# EAGLE board ext_board (EAGLE 5.01)
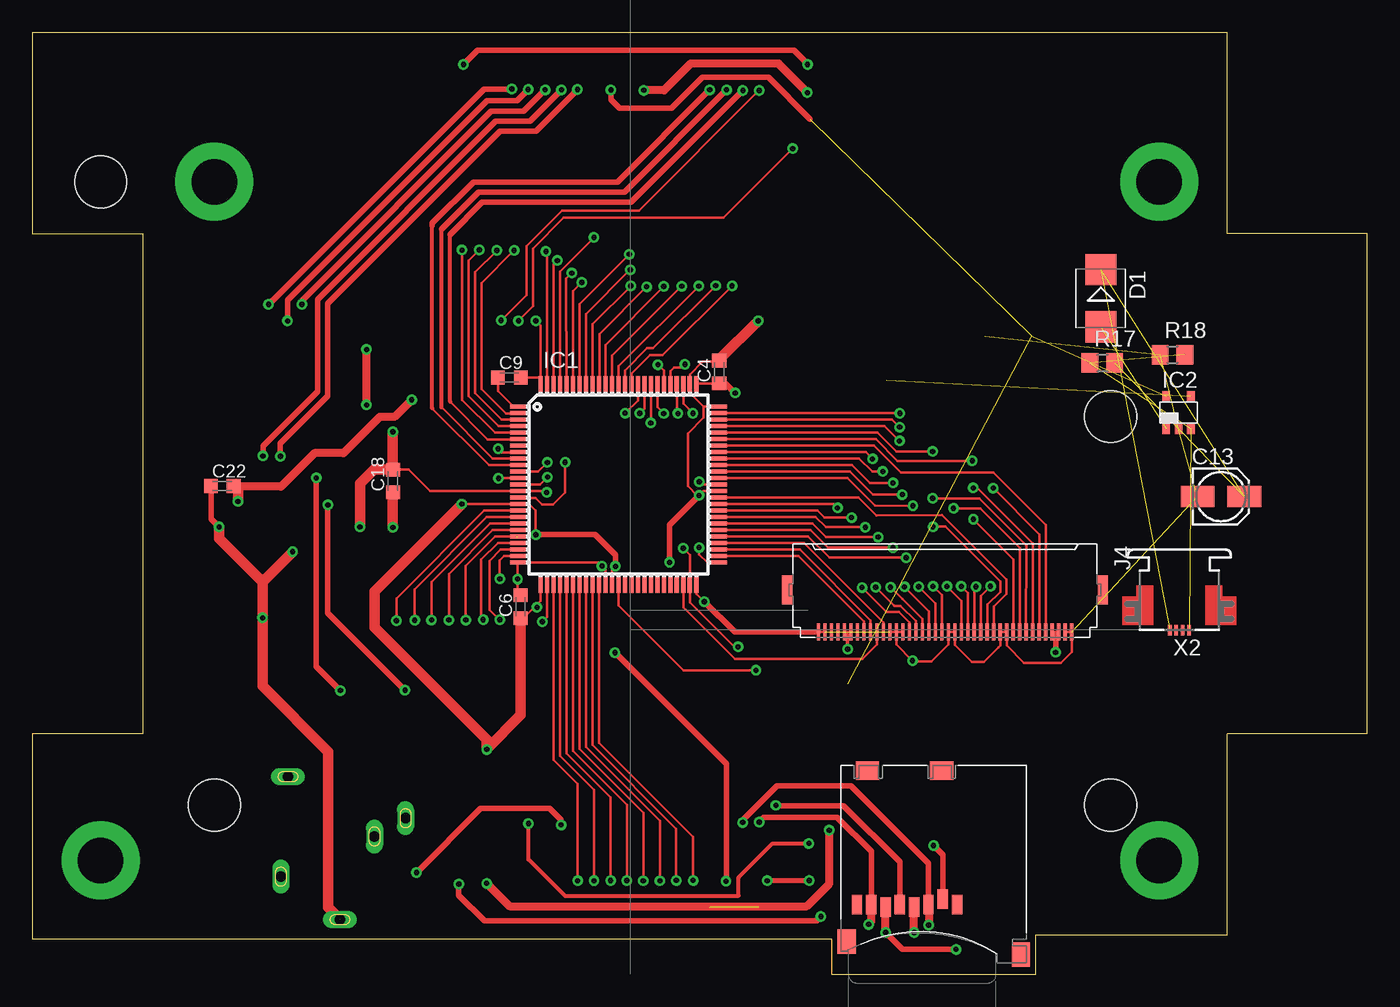
[diagram p0: board, top side]
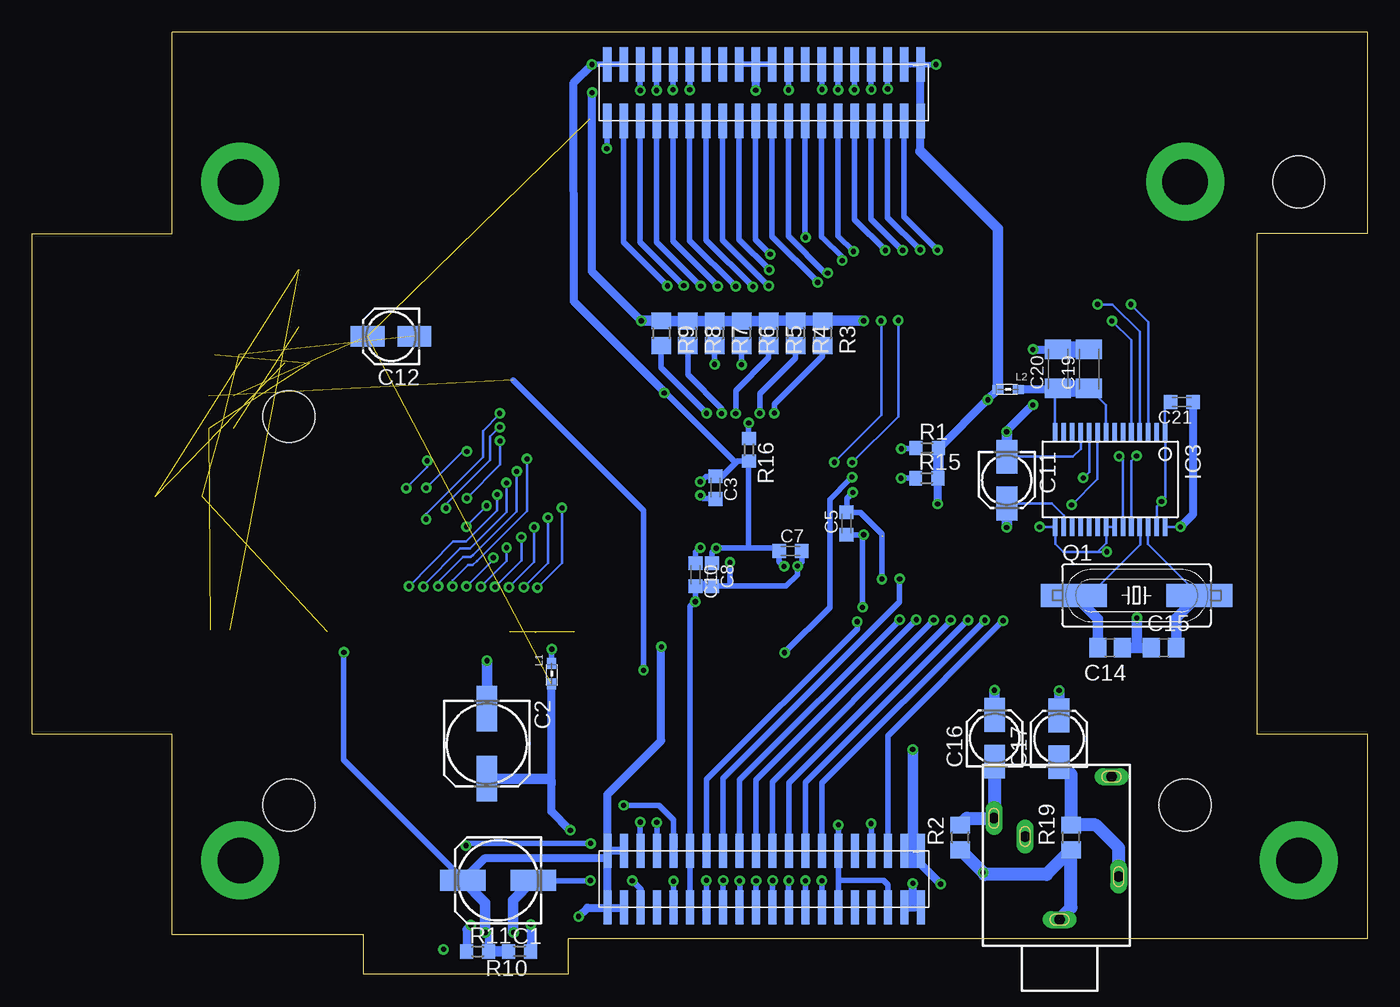
[diagram p1: board, bottom side, seen from below]

Size 102.75 x 72.53 mm. Coordinates in mm from the lower left corner, seen from the top.
Outline: 0,2.73 61.5,2.73 61.5,0 77.27,0 77.27,3.03 92,3.03 92,18.53 102.75,18.53 102.75,57.03 92,57.03 92,72.53 0,72.53 0,57.03 8.5,57.03 8.5,18.53 0,18.53 0,2.73
Copper layers (1*16): Top 0.035mm / dielectric 1.5mm / Bottom 0.035mm
Design rules "default *": minimum track width 0.2mm, minimum drill 0.4mm, track to track 0.2mm, track to pad 0.2mm, pad to pad 0.18mm, via to via 0.2mm, smd to smd 0.1mm, copper to edge 35mil, drill to drill 8mil, minimum pad ring 10mil, minimum via ring 8mil, stop-mask expansion 4mil, vias tented up to drill 0mil, thermal gap 10mil
Holes 4 mm at 83,13.03 14,13.03 5.25,61.03 83,42.95

## Footprints (pad centres in the part's own frame; a part is rotated, then mirrored left to right if it is on the bottom)
153CLV-0605 = smd 3.5 x 1.6: + 2.7,0; - -2.7,0
C0603K = smd 1.05 x 1.08: 1 -0.875,0; 2 0.875,0
153CLV-0405 = smd 2.6 x 1.6: + 1.8,0; - -1.8,0
C0805 = smd 1.3 x 1.5: 1 -0.95,0; 2 0.95,0
C1206K = smd 1.5 x 2: 1 -1.5,0; 2 1.5,0
SMB = smd 2.4 x 2.4: A 2.2,0; C -2.2,0
TQFP100 = smd 1.2 x 0.32: 1 -1.4,12.35; 2 -1.4,11.85; 3 -1.4,11.35; 4 -1.4,10.85; 5 -1.4,10.35; 6 -1.4,9.85; 7 -1.4,9.35; 8 -1.4,8.85; 9 -1.4,8.35; 10 -1.4,7.85; 11 -1.4,7.35; 12 -1.4,6.85; 13 -1.4,6.35; 14 -1.4,5.85; 15 -1.4,5.35; 16 -1.4,4.85; 17 -1.4,4.35; 18 -1.4,3.85; 19 -1.4,3.35; 20 -1.4,2.85; 21 -1.4,2.35; 22 -1.4,1.85; 23 -1.4,1.35; 24 -1.4,0.85; 25 -1.4,0.35; 51 14.1,0.35; 52 14.1,0.85; 53 14.1,1.35; 54 14.1,1.85; 55 14.1,2.35; 56 14.1,2.85; 57 14.1,3.35; 58 14.1,3.85; 59 14.1,4.35; 60 14.1,4.85; 61 14.1,5.35; 62 14.1,5.85; 63 14.1,6.35; 64 14.1,6.85; 65 14.1,7.35; 66 14.1,7.85; 67 14.1,8.35; 68 14.1,8.85; 69 14.1,9.35; 70 14.1,9.85; 71 14.1,10.35; 72 14.1,10.85; 73 14.1,11.35; 74 14.1,11.85; 75 14.1,12.35 | smd 0.32 x 1.2: 26 0.35,-1.4; 27 0.85,-1.4; 28 1.35,-1.4; 29 1.85,-1.4; 30 2.35,-1.4; 31 2.85,-1.4; 32 3.35,-1.4; 33 3.85,-1.4; 34 4.35,-1.4; 35 4.85,-1.4; 36 5.35,-1.4; 37 5.85,-1.4; 38 6.35,-1.4; 39 6.85,-1.4; 40 7.35,-1.4; 41 7.85,-1.4; 42 8.35,-1.4; 43 8.85,-1.4; 44 9.35,-1.4; 45 9.85,-1.4; 46 10.35,-1.4; 47 10.85,-1.4; 48 11.35,-1.4; 49 11.85,-1.4; 50 12.35,-1.4; 76 12.35,14.1; 77 11.85,14.1; 78 11.35,14.1; 79 10.85,14.1; 80 10.35,14.1; 81 9.85,14.1; 82 9.35,14.1; 83 8.85,14.1; 84 8.35,14.1; 85 7.85,14.1; 86 7.35,14.1; 87 6.85,14.1; 88 6.35,14.1; 89 5.85,14.1; 90 5.35,14.1; 91 4.85,14.1; 92 4.35,14.1; 93 3.85,14.1; 94 3.35,14.1; 95 2.85,14.1; 96 2.35,14.1; 97 1.85,14.1; 98 1.35,14.1; 99 0.85,14.1; 100 0.35,14.1
SOT23-5 = smd 0.6 x 0.8: 1 0.32,1.29; 2 1.27,1.29; 3 2.22,1.29; 4 2.22,3.79; 5 0.32,3.79
SSOP28 = smd 0.348 x 1.397: 1 1.614,-0.595; 2 2.264,-0.595; 3 2.914,-0.595; 4 3.564,-0.595; 5 4.214,-0.595; 6 4.864,-0.595; 7 5.514,-0.595; 8 6.164,-0.595; 9 6.814,-0.595; 10 7.464,-0.595; 11 8.114,-0.595; 12 8.764,-0.595; 13 9.414,-0.595; 14 10.064,-0.595; 15 10.064,6.717; 16 9.414,6.717; 17 8.764,6.717; 18 8.114,6.717; 19 7.464,6.717; 20 6.814,6.717; 21 6.164,6.717; 22 5.514,6.717; 23 4.864,6.717; 24 4.214,6.717; 25 3.564,6.717; 26 2.914,6.717; 27 2.264,6.717; 28 1.614,6.717
PLHTD40S-GC = smd 2.65 x 0.65: 1 0,24.13; 2 0,22.86; 3 0,21.59; 4 0,20.32; 5 0,19.05; 6 0,17.78; 7 0,16.51; 8 0,15.24; 9 0,13.97; 10 0,12.7; 11 0,11.43; 12 0,10.16; 13 0,8.89; 14 0,7.62; 15 0,6.35; 16 0,5.08; 17 0,3.81; 18 0,2.54; 19 0,1.27; 20 0,0; 21 4.35,0; 22 4.35,1.27; 23 4.35,2.54; 24 4.35,3.81; 25 4.35,5.08; 26 4.35,6.35; 27 4.35,7.62; 28 4.35,8.89; 29 4.35,10.16; 30 4.35,11.43; 31 4.35,12.7; 32 4.35,13.97; 33 4.35,15.24; 34 4.35,16.51; 35 4.35,17.78; 36 4.35,19.05; 37 4.35,20.32; 38 4.35,21.59; 39 4.35,22.86; 40 4.35,24.13
XF2H-4015-1LW = smd 1.3 x 0.25: 1 3.175,9.75; 2 3.175,9.25; 3 3.175,8.75; 4 3.175,8.25; 5 3.175,7.75; 6 3.175,7.25; 7 3.175,6.75; 8 3.175,6.25; 9 3.175,5.75; 10 3.175,5.25; 11 3.175,4.75; 12 3.175,4.25; 13 3.175,3.75; 14 3.175,3.25; 15 3.175,2.75; 16 3.175,2.25; 17 3.175,1.75; 18 3.175,1.25; 19 3.175,0.75; 20 3.175,0.25; 21 3.175,-0.25; 22 3.175,-0.75; 23 3.175,-1.25; 24 3.175,-1.75; 25 3.175,-2.25; 26 3.175,-2.75; 27 3.175,-3.25; 28 3.175,-3.75; 29 3.175,-4.25; 30 3.175,-4.75; 31 3.175,-5.25; 32 3.175,-5.75; 33 3.175,-6.25; 34 3.175,-6.75; 35 3.175,-7.25; 36 3.175,-7.75; 37 3.175,-8.25; 38 3.175,-8.75; 39 3.175,-9.25; 40 3.175,-9.75 | smd 2.2 x 0.8: M1 -0.075,12.15; M2 -0.075,-12.15
0603 = smd 0.85 x 0.7: 1 -0.9,0; 2 0.7,0
SM49 = smd 5.08 x 1.778: 1 -4.826,0; 2 4.826,0
R0603 = smd 1 x 1.1: 1 -0.85,0; 2 0.85,0
R0805 = smd 1.3 x 1.5: 1 -0.95,0; 2 0.95,0
MICROSD = smd 0.8 x 1.5: 1 -1.94,2.7; 2 -0.84,2.3; 3 0.26,2.7; 4 1.36,2.9; 5 2.46,2.7; 6 3.56,2.9; 7 4.66,2.7; 8 5.76,2.7 | smd 1.4 x 1.9: NC -6.85,6.55; NC3 6.55,5.55 | smd 1.8 x 1.4: NC1 -0.75,-7.6; NC2 4.95,-7.6
1503_09 = drill 0.8 pad 1.2 long: 1 0,-2.1; 2 -4.55,-5.4; 3 5.05,-9.9; 4 -4,-13.1; 5 2.65,-8.5
52746-4 = smd 0.3 x 0.8: 1 -0.75,0.6; 2 -0.25,0.6; 3 0.25,0.6; 4 0.75,0.6

## Placement (x,y rotation side)
C1  47uF/16V  [153CLV-0605]  66.9,7.24 180 bottom
C2  47uF/16V  [153CLV-0605]  67.77,17.77 270 bottom
C3  100n  [C0603K]  50.15,37.48 270 bottom
C4  100n  [C0603K]  52.88,46.38 90 top
C5  100n  [C0603K]  40.09,34.72 90 bottom
C6  100n  [C0603K]  37.59,28.31 90 top
C7  100n  [C0603K]  44.39,32.59 0 bottom
C8  100n  [C0603K]  50.42,30.77 270 bottom
C9  100n  [C0603K]  36.71,45.95 0 top
C10  100n  [C0603K]  51.69,30.78 270 bottom
C11  10uF/25V  [153CLV-0405]  27.74,38.05 270 bottom
C12  4.7uF/50V  [153CLV-0405]  75.14,49.13 180 bottom
C13  1uF/50V  [153CLV-0405]  91.5,36.79 0 top
C14  22pF  [C0805]  19.79,25.15 180 bottom
C15  22pF  [C0805]  15.65,25.15 0 bottom
C16  4.7uF/50V  [153CLV-0405]  28.67,18.18 90 bottom
C17  4.7uF/50V  [153CLV-0405]  23.72,18.14 90 bottom
C18  100n  [C0603K]  27.75,37.98 90 top
C19  4.7uF  [C1206K]  21.4,46.61 90 bottom
C20  4.7uF  [C1206K]  23.8,46.63 90 bottom
C21  100n  [C0603K]  14.26,44.06 180 bottom
C22  100n  [C0603K]  14.62,37.59 0 top
D1  10BQ040PBF  [SMB]  82.26,52.06 270 top
IC1  SSD1906  [TQFP100]  38.76,31.36 0 top
IC2  TPS61040  [SOT23-5]  86.97,40.73 0 top
IC3  TLV320DAC23  [SSOP28]  13.93,41.16 180 bottom
J2  PBHTD40SPP  [PLHTD40S-GC]  58.5,70.07 270 bottom
J3  PBHTD40SPP  [PLHTD40S-GC]  58.48,9.51 270 bottom
J4  XF2H-4015-1LW  [XF2H-4015-1LW]  70.26,29.53 270 top
L1  LCBA-601  [0603]  62.78,23.06 270 bottom
L2  LCBA-601  [0603]  27.74,45.04 180 bottom
Q1  18.432 MHz  [SM49]  17.75,29.19 0 bottom
R1  10k  [R0603]  33.87,40.53 0 bottom
R2  470R  [R0805]  31.32,10.54 90 bottom
R3  4.7k  [R0805]  41.93,49.37 270 bottom
R4  4.7k  [R0805]  44,49.37 270 bottom
R5  4.7k  [R0805]  46.08,49.35 270 bottom
R6  4.7k  [R0805]  48.16,49.37 270 bottom
R7  4.7k  [R0805]  50.24,49.36 270 bottom
R8  4.7k  [R0805]  52.31,49.36 270 bottom
R9  4.7k  [R0805]  54.36,49.37 270 bottom
R10  10k  [R0603]  65.25,1.77 180 bottom
R11  10k  [R0603]  68.49,1.75 0 bottom
R15  10k  [R0603]  33.9,38.21 0 bottom
R16  10k  [R0603]  47.58,40.39 270 bottom
R17  2.2k  [R0805]  82.37,47.07 0 top
R18  1k  [R0805]  87.77,47.72 0 top
R19  470R  [R0805]  22.79,10.55 90 bottom
U$13  SF-MICROSD  [MICROSD]  69.24,8.08 180 top
X1  1503_09  [1503_09]  23.68,2.12 180 bottom
X2  52746-4  [52746-4]  88.3,27.1 180 top

## Library data of the parts
C1-C22 R1-R11 R15-R19 = rcl
D1 = diode
IC1-IC3 J2 J3 = mylib
J4 = con-omron
L1 L2 = wuerth-elektronik
Q1 = crystal
U$13 = microsd
X1 = con-lumberg
X2 = con-molex

## Nets
+3V3: C1.+ C3.1 C4.1 C5.1 C6.1 C7.1 C8.1 C21.2 C22.2 IC1.16 IC1.26 IC1.37 IC1.49 IC1.63 IC1.76 IC3.1 IC3.27 J2.1 J2.2 J2.19 J2.20 J2.40 J3.1 J3.2 J3.19 J3.20 J3.21 J3.22 J4.3 J4.4 L2.2 R1.2 R10.2 R11.2 R15.2 R16.2 U$13.4
+5V: C2.+ C12.+ IC2.5 J2.9 J3.39 J3.40 L1.2
A0/NBS0: IC1.5 J2.39
A1/NBS2: IC1.4 J2.38
A2: IC1.3 J2.37
A3: IC1.2 J2.36
A4: IC1.99 J2.35
A5: IC1.98 J2.34
A6: IC1.97 J2.33
A7: IC1.96 J2.32
A8: IC1.95 J2.31
A9: IC1.94 J2.30
A10: IC1.93 J2.29
A11: IC1.92 J2.28
A12: IC1.91 J2.27
A13: IC1.90 J2.26
A14: IC1.89 J2.25
A15: IC1.88 J2.24
A16/BA0: IC1.87 J2.23
A17/BA1: IC1.86 J2.22
A18: IC1.7
B0: IC1.55 J4.21
B1: IC1.56 J4.22
B2: IC1.57 J4.23
B3: IC1.58 J4.24
B4: IC1.59 J4.25
B5: IC1.60 J4.26
CLK: IC1.54 J4.30
D0: IC1.35 J3.27
D1: IC1.34 J3.28
D2: IC1.33 J3.29
D3: IC1.32 J3.30
D4: IC1.31 J3.31
D5: IC1.30 J3.32
D6: IC1.29 J3.33
D7: IC1.28 J3.34
D8: IC1.27 J3.14
D9: IC1.24 J3.13
D10: IC1.23 J3.12
D11: IC1.22 J3.11
D12: IC1.21 J3.10
D13: IC1.20 J3.9
D14: IC1.19 J3.8
D15: IC1.18 J3.7
DISP: IC1.48 J4.31
G0: IC1.61 J4.13
G1: IC1.64 J4.14
G2: IC1.65 J4.15
G3: IC1.66 J4.16
G4: IC1.67 J4.17
G5: IC1.68 J4.18
GND: C1.- C2.- C3.2 C4.2 C5.2 C6.2 C7.2 C8.2 C9.2 C10.2 C11.- C12.- C13.- C14.1 C15.1 C18.2 C19.2 C20.2 C21.1 C22.1 IC1.14 IC1.25 IC1.36 IC1.50 IC1.62 IC1.75 IC1.77 IC1.100 IC2.2 IC3.11 IC3.15 IC3.21 IC3.22 IC3.28 J2.10 J2.11 J2.12 J3.6 J3.15 J3.23 J3.26 J3.35 J3.38 J4.1 J4.2 J4.11 J4.12 J4.19 J4.20 J4.27 J4.28 J4.29 J4.39 J4.40 R2.1 R3.1 R4.1 R5.1 R6.1 R7.1 R8.1 R9.1 R18.1 R19.1 U$13.6 X1.1
HSYNC: IC1.53 J4.32
MISO: J3.18 R10.1 U$13.7
MOSI: J3.17 R11.1 U$13.3
N$1: IC1.12 R15.1
N$2: IC1.83 R16.1
N$3: J4.35 J4.36 L1.1
N$4: D1.A IC2.1
N$5: IC1.38 IC2.4
N$6: C13.+ D1.C R17.2 X2.4
N$7: IC2.3 R17.1 R18.2 X2.1
N$8: C14.2 IC3.25 Q1.1
N$9: C15.2 IC3.26 Q1.2
N$14: C10.1 IC1.51
N$15: C9.1 IC1.1
N$23: IC1.8 R1.1
N$35: IC1.85 R3.2
N$36: IC1.84 R4.2
N$37: IC1.82 R5.2
N$38: IC1.81 R6.2
N$39: IC1.80 R7.2
N$40: IC1.79 R8.2
N$41: IC1.78 R9.2
N$65: C11.+ C18.1 IC3.16
N$67: C16.+ IC3.9
N$68: C17.+ IC3.10
N$69: C17.- R19.2 X1.2
N$70: C16.- R2.2 X1.3
NBS1/NUB: IC1.11 J2.18
NCS3: IC1.6 J2.17
NOE: IC1.9 J2.16
NPCS1: J3.4 U$13.2
NPCS3: J3.5
NRST: IC1.13 J3.25
NWAIT: IC1.17 J3.3
NWE: IC1.10 J2.15
PB6: J2.8
PB8: J2.13
PB10: J2.14
PB27/PCK0: IC1.15 J2.21
PC10: J3.37
R0: IC1.69 J4.5
R1: IC1.70 J4.6
R2: IC1.71 J4.7
R3: IC1.72 J4.8
R4: IC1.73 J4.9
R5: IC1.74 J4.10
SPCK: J3.16 U$13.5
TD0: IC3.4 J2.5
TF0: IC3.5 J2.4
TK0: IC3.3 J2.3
TWCK: IC3.24 J2.6
TWD: IC3.23 J2.7
VCCA: C19.1 C20.1 IC3.8 IC3.14 L2.1
VSYNC: IC1.52 J4.33

## Tracks (layer width: path | path; a pad name or v marks a point on that pad's centre or on a via)
+3V3  (via drill 0.4)
  Top 0.2: v50.1,32.81 50.61,32.3 IC1.49 50.61,28.65 54.04,25.22 54.06,25.22 v54.32,25.22 | IC1.37 44.61,31.14 44.85,31.38 | C6.1 37.8,27.43 38.8,28.43 39.11,28.74 39.11,29.91 39.13,29.93 IC1.26 | v38.75,33.85 38.75,35.72 38.27,36.2 37.35,36.2 | 37.35,36.2 37.31,36.2 | 37.35,36.2 IC1.16 37.38,36.21 | 51.11,45.43 51.1,45.42 | 51.11,45.43 IC1.76 | C4.1 51.19,45.51 51.11,45.43 | IC1.63 51.56,37.71 v51.34,37.93 | 37.38,36.21 37.4,36.2 | v33.05,36.22 37.37,36.22 37.38,36.21 | J4.3 78.96,26.35 78.95,26.35 J4.4 78.78,26.35 78.78,26.22
  Top 0.406: 38.74,33.86 38.73,33.86 | v38.75,33.85 38.74,33.86 | 38.74,33.86 43.31,33.86 44.88,32.29 v44.88,31.41 44.83,31.36 | 44.83,31.36 | 38.8,28.43 38.84,28.4 v38.84,28.27 v38.84,28.26 | 44.86,31.39 44.85,31.38 | 44.83,31.36 44.86,31.39 | 44.86,31.39 44.86,31.4 | C4.1 53.38,45.51 v54.11,44.77 | 15.82,37.26 C22.2 | v78.78,24.8 78.78,26.22 | v33.19,70.07 34.27,71.15 58.63,71.15 59.68,70.11 v59.68,70.07 | v60.7,4.46 60.38,4.14 34.79,4.14 32.82,6.1 v32.82,6.95
  Top 0.6: 15.82,37.26 15.82,37.56 19.13,37.56 21.71,40.14 23.95,40.14 26.73,42.92 27.88,42.92 v29.2,44.24
  Top 0.61: U$13.4 67.87,5.18 67.87,3.24 v67.89,3.22
  Top 0.813: v15.82,36.42 15.83,36.43 15.82,36.44 15.82,37.26 | v34.98,17.32 34.98,18.08 26.34,26.71 26.34,29.49 33.05,36.2 v33.05,36.22 | C6.1 37.59,19.97 34.99,17.36
  Bottom 0.2: IC3.27 16.2,36.04 v15.82,36.42 15.84,36.42 15.55,36.71 IC3.1 15.56,41.77 15.56,43.64 C21.2
  Bottom 0.406: 35.62,9.56 35.63,9.57 | 35.62,9.56 J3.2 | J3.1 34.97,9.51 35.57,9.51 35.62,9.56 | J3.19 57.28,9.51 57.36,9.43 57.44,9.51 J3.20 58.45,9.54 | 58.5,5.13 58.5,5.15 J3.21 58.48,5.14 | 57.24,5.13 J3.22 | 58.48,5.14 58.45,5.1 | 58.48,5.14 58.45,5.24 58.5,5.28 58.5,9.39 58.45,9.44 58.45,9.54 | 58.45,9.54 58.45,9.56 | J2.1 34.39,70.05 35.66,70.05 | 34.37,65.74 J2.40 34.37,65.66 34.41,65.62 34.37,65.57 | 35.66,70.05 35.67,70.05 | 35.66,70.05 J2.2 | J2.20 58.54,70.07 | J2.20 | J2.20 J2.19 57.22,70.08 | 69.65,7.24 C1.+ 69.55,7.29 78.78,16.51 v78.78,24.8 | C8.1 50.42,32.49 v50.1,32.81 50.11,32.82 | v44.88,31.41 45.26,31.8 C7.1 45.49,32.82 50.11,32.82 | C5.1 v38.75,33.85 38.84,33.76 v38.84,28.26 | 50.11,32.82 50.12,32.82 | 54.05,44.79 v54.11,44.77 | 54.04,44.81 53.88,44.68 48.62,39.43 48.49,39.55 | 48.49,39.55 47.68,39.55 47.66,39.57 47.63,39.54 R16.2 47.62,39.54 | v51.34,37.93 50.91,38.35 C3.1 49.67,38.35 48.49,39.53 48.49,39.55 | 47.62,39.54 47.62,39.55 | 50.11,32.82 47.62,32.82 47.62,39.54 | 35.66,70.05 33.2,70.05 v33.19,70.07 | 57.22,70.08 57.21,70.08 | v59.68,70.07 59.66,70.08 57.22,70.08
  Bottom 0.6: R1.2 32.94,40.54 29.23,44.25 | 29.23,44.25 L2.2 | 29.23,44.25 29.22,44.24 v29.2,44.24 | R15.2 v33.05,36.22 | 34.37,63.37 34.37,65.57
  Bottom 0.61: 34.37,65.74 J2.1 | v67.89,3.22 v67.88,3.22 67.87,3.23 67.64,2.99 R11.2 | 58.48,5.14 58.48,8.93 67.96,8.93 69.65,7.24 | 54.05,44.79 61.08,51.83 61.12,68.62 59.72,70.02 59.7,70.02 59.7,70.04 v59.68,70.07 | J3.19 J3.20 58.48,13.85 54.34,17.99 54.34,25.06 54.42,25.14 54.33,25.22 v54.32,25.22 | 57.24,5.13 60.03,5.13 v60.7,4.46 | v32.82,6.95 34.37,8.49 35.25,8.49 34.97,8.77 | 34.97,9.51
  Bottom 0.813: C1.+ 67.89,5.53 v67.89,3.22 | R11.2 67.62,1.75 67.59,1.72 67.55,1.77 R10.2 | v34.98,17.32 34.97,17.15 34.97,9.51 | R15.2 33.02,38.24 R1.2 | L2.2 28.44,57.44 34.37,63.37 | 34.97,8.77 34.97,9.51
+5V  (via drill 0.4)  (3 unrouted)
  Top 0.406: v44.53,68.1 44.53,67.35 45.19,66.69 49.2,66.69 51.57,69.06 56.67,69.06 59.88,65.85
  Top 0.61: v34.97,7.01 36.73,5.25 59.61,5.25 61.35,6.98 v61.35,11.1
  Bottom 0.406: J3.39 J3.40 | J2.9 v44.53,68.1
  Bottom 0.61: J3.39 34.72,5.16 34.72,5.67 35.04,5.67 35.04,5.83 34.97,5.83 v34.97,7.01 | 62.78,14.89 62.78,14.64 62.78,14.65 62.79,14.65 62.79,12.54 v61.35,11.1 | 62.78,14.89 L1.2 | 62.78,14.89 63.13,15.05
  Bottom 0.813: C2.+ 67.59,15.05 63.13,15.05
A0/NBS0  (via drill 0.4)
  Top 0.2: v33.07,55.78 33.07,54.86 33.07,44.24 35.6,41.71 IC1.5 | IC1.5 | IC1.5 | IC1.5 37.39,41.68
  Bottom 0.406: J2.39 35.64,58.36 v33.07,55.78
A1/NBS2  (via drill 0.4)
  Top 0.2: v34.41,55.79 33.57,54.95 33.57,44.53 35.89,42.21 IC1.4 | IC1.4 37.45,42.21 | IC1.4
  Bottom 0.406: J2.38 36.91,58.29 v34.41,55.79
A2  (via drill 0.4)
  Top 0.2: v35.76,55.75 34.07,54.06 34.08,44.77 36.13,42.72 37.1,42.72 | 37.1,42.72 37.23,42.72 | 37.1,42.72 37.1,42.73 37.13,42.71 IC1.3
  Bottom 0.406: J2.37 38.18,58.17 v35.76,55.75
A3  (via drill 0.4)
  Top 0.2: v37.08,55.75 34.57,53.24 34.58,45.06 36.46,43.18 37.39,43.18 | 37.39,43.18 37.56,43.18 | IC1.2 37.39,43.18
  Bottom 0.406: J2.36 39.45,58.11 v37.08,55.75
A4  (via drill 0.4)
  Top 0.2: IC1.99 39.62,55.59 v39.54,55.67
  Bottom 0.406: J2.35 40.72,56.86 v39.54,55.67
A5  (via drill 0.4)
  Top 0.2: IC1.98 40.11,54.67 v40.41,54.97
  Bottom 0.406: J2.34 42,65.77 | J2.34 | v40.41,54.97 40.41,55.22 41.97,56.77 42,56.82 J2.34
A6  (via drill 0.4)
  Top 0.2: IC1.97 40.61,54.12 v43.23,56.74
  Bottom 0.406: J2.33 43.26,56.76 v43.23,56.74
A7  (via drill 0.4)
  Top 0.2: IC1.96 41.1,53.58 v41.53,54.01
  Bottom 0.406: v41.53,54.01 41.72,54.01 44.55,56.83 44.54,65.74 | 44.54,65.74 | 44.54,65.74 J2.32
A8  (via drill 0.4)
  Top 0.2: IC1.95 41.61,52.61 v42.29,53.29
  Bottom 0.406: J2.31 45.8,56.8 v42.29,53.29
A9  (via drill 0.4)
  Top 0.2: IC1.94 42.12,51.62 v45.95,55.45
  Bottom 0.406: J2.30 47.07,56.57 v45.95,55.45
A10  (via drill 0.4)
  Top 0.2: IC1.93 42.61,50.84 v46.02,54.25
  Bottom 0.406: J2.29 48.36,65.7 48.34,56.58 v46.02,54.25
A11  (via drill 0.4)
  Top 0.2: 43.14,45.43 43.14,45.36 | IC1.92 43.14,45.43 | v46.07,53.01 43.14,50.08 43.14,45.43
  Bottom 0.406: J2.28 49.61,56.55 v46.07,53.01
A12  (via drill 0.4)
  Top 0.2: 43.64,45.43 43.64,45.36 | IC1.91 43.64,45.43 | v47.28,52.95 43.64,49.31 43.64,45.43
  Bottom 0.406: J2.27 50.88,56.55 v47.28,52.95
A13  (via drill 0.4)
  Top 0.2: IC1.90 | IC1.90 | v48.6,52.97 44.11,48.47 IC1.90
  Bottom 0.406: J2.26 52.15,56.52 v48.6,52.97
A14  (via drill 0.4)
  Top 0.2: IC1.89 44.63,45.45 44.63,47.64 v49.99,52.99
  Bottom 0.406: J2.25 53.44,56.44 v49.99,52.99
A15  (via drill 0.4)
  Top 0.2: IC1.88 45.12,46.82 v51.3,53
  Bottom 0.406: J2.24 54.7,56.4 v51.3,53
A16/BA0  (via drill 0.4)
  Top 0.2: v52.61,53.03 47.78,48.21 47.3,48.21 45.6,46.51 45.6,45.32 45.61,45.33 IC1.87
  Bottom 0.406: J2.23 55.96,56.38 v52.61,53.03
A17/BA1  (via drill 0.4)
  Top 0.2: v53.87,53.01 48.51,47.68 47.56,47.68 46.13,46.25 46.13,45.48 IC1.86
  Bottom 0.406: J2.22 57.23,56.4 v53.87,53.01
B0  (via drill 0.4)
  Top 0.2: IC1.55 59.72,33.71 61.34,32.08 v67.26,32.08 | v67.26,32.08 | J4.21 70.03,26.37 | J4.21 | v69.33,29.88 70,29.2 J4.21
  Bottom 0.2: v67.26,32.08 67.3,31.91 v69.33,29.88
B1  (via drill 0.4)
  Top 0.2: IC1.56 59.88,34.21 61.23,32.86 v66.25,32.86 | 69.53,26.3 69.53,26.33 J4.22 69.52,26.37 69.52,28.57 v68.22,29.86
  Bottom 0.2: v66.25,32.86 66.24,31.84 v68.22,29.86
B2  (via drill 0.4)
  Top 0.2: IC1.57 60.06,34.71 61.09,33.68 v65.11,33.67 | 69.03,26.3 69.03,26.34 J4.23 69.02,26.34 | 69.02,26.34 | v67.14,29.84 69.02,27.95 69.02,26.34
  Bottom 0.2: v65.11,33.67 65.1,31.88 v67.14,29.84
B3  (via drill 0.4)
  Top 0.2: IC1.58 60.28,35.21 61.07,34.43 v64.12,34.43 | v66.06,29.82 66.98,28.89 68.51,27.36 J4.24 | 68.53,26.24 68.53,26.34 J4.24 | J4.24 | J4.24
  Bottom 0.2: v64.12,34.43 64.13,31.74 v66.06,29.82
B4  (via drill 0.4)
  Top 0.2: IC1.59 60.43,35.71 60.97,35.17 v63.06,35.17 | v64.92,29.82 66.34,28.41 66.37,28.38 66.83,28.38 68.01,27.2 J4.25 68.04,26.39
  Bottom 0.2: v63.06,35.17 63.05,31.68 v64.92,29.82
B5  (via drill 0.4)
  Top 0.2: IC1.60 61.69,36.21 v61.98,35.91 | v63.87,29.79 65.75,27.9 66.7,27.9 67.52,27.08 J4.26 | J4.26 | J4.26
  Bottom 0.2: v61.98,35.91 61.97,31.68 v63.87,29.79
CLK
  Top 0.2: IC1.54 59.4,33.2 65.51,27.1 65.52,26.41 65.51,26.4 J4.30
D0  (via drill 0.4)
  Top 0.2: IC1.35 43.61,17.84 50.86,10.59 v50.86,7.24
  Bottom 0.406: J3.27 50.86,5.11 | J3.27 | J3.27 v50.86,7.24
D1  (via drill 0.4)
  Top 0.2: IC1.34 43.11,17.67 49.56,11.21 v49.56,7.24
  Bottom 0.406: J3.28 | v49.56,7.24 49.59,7.21 J3.28
D2  (via drill 0.4)
  Top 0.2: IC1.33 42.61,17.51 48.3,11.82 v48.3,7.2
  Bottom 0.406: J3.29 48.3,5.15 48.29,5.15 48.29,7.19 v48.3,7.2
D3  (via drill 0.4)
  Top 0.2: IC1.32 42.11,17.36 47.03,12.44 v47.03,7.2
  Bottom 0.406: 47.03,5.15 47.03,5.11 | J3.30 47.03,5.15 | 47.03,5.15 v47.03,7.2
D4  (via drill 0.4)
  Top 0.2: IC1.31 41.61,17.22 45.76,13.06 v45.76,7.21
  Bottom 0.406: J3.31 45.76,5.18 v45.76,7.21
D5  (via drill 0.4)
  Top 0.2: IC1.30 41.11,17.03 44.5,13.64 v44.51,7.21
  Bottom 0.406: J3.32 44.53,5.18 44.53,7.2 v44.51,7.21
D6  (via drill 0.4)
  Top 0.2: IC1.29 40.61,16.83 43.25,14.2 v43.24,7.2
  Bottom 0.406: J3.33 v43.24,7.2
D7  (via drill 0.4)
  Top 0.2: IC1.28 40.11,16.53 41.96,14.68 41.95,7.14 v41.98,7.2
  Bottom 0.406: J3.34 41.97,7.3 v41.98,7.2
D8  (via drill 0.4)
  Top 0.2: IC1.27 39.61,27.51 v39.25,27.15
  Bottom 0.406: v39.25,27.15 39.25,26.61 50.85,15.01 50.85,9.37 | 50.85,9.37 50.86,9.37 J3.14 | 50.85,9.37 50.83,9.34
D9  (via drill 0.4)
  Top 0.2: IC1.24 36.31,32.21 35.97,31.87 35.97,30.48 v35.99,30.46
  Bottom 0.406: v35.99,30.46 35.99,28.67 49.57,15.09 49.57,9.72 49.66,9.63 49.59,9.55 J3.13
D10  (via drill 0.4)
  Top 0.2: v35.98,27.31 35.2,28.08 35.2,31.84 36.06,32.7 37.33,32.7 37.34,32.71 IC1.23
  Bottom 0.406: J3.12 48.32,14.96 v35.98,27.31
D11  (via drill 0.4)
  Top 0.2: IC1.22 35.83,33.21 34.56,31.94 34.56,27.45 v34.7,27.31
  Bottom 0.406: J3.11 47.03,9.53 47.03,14.98 v34.7,27.31
D12  (via drill 0.4)  (1 unrouted)
  Top 0.2: v33.36,27.28 33.36,31.46 35.62,33.72 37.28,33.72
  Bottom 0.406: J3.10 45.78,14.82 v33.36,27.28
D13  (via drill 0.4)
  Top 0.2: v32.06,27.29 32.06,30.85 35.41,34.2 37.49,34.2 37.48,34.21 IC1.20
  Bottom 0.406: J3.9 44.51,14.75 32.13,27.13 v32.06,27.29
D14  (via drill 0.4)
  Top 0.2: v30.73,27.28 30.73,30.21 35.23,34.71 37.22,34.71 37.24,34.69 37.26,34.71 IC1.19
  Bottom 0.406: J3.8 43.24,14.77 v30.73,27.28
D15  (via drill 0.4)
  Top 0.2: IC1.18 34.97,35.21 29.41,29.65 v29.42,27.26
  Bottom 0.406: J3.7 41.98,9.51 41.95,14.74 v29.42,27.26
DISP
  Top 0.2: IC1.48 50.11,28.27 54.08,24.3 63.89,24.28 65.02,25.4 65.02,26.26 65,26.28 65.01,26.3 J4.31
G0
  Top 0.2: IC1.61 63.6,36.71 64.98,35.33 70.03,35.35 74.98,30.4 74.98,29.27 74.97,29.27 74.01,28.32 J4.13
G1  (via drill 0.4)
  Top 0.2: IC1.64 62.76,38.21 64.87,36.1 v67.79,36.08 | 73.49,26.35 73.48,26.35 | J4.14 73.49,26.35 | 73.49,26.35 73.52,26.39 73.52,28.47 74.52,29.45 74.53,30 74.52,30.24 70.27,34.49 v69.33,34.47
  Bottom 0.2: v69.33,34.47 v69.34,34.46 69.34,34.46 69.34,34.52 v67.79,36.08
G2  (via drill 0.4)
  Top 0.2: IC1.65 62.92,38.71 64.69,36.94 v66.97,36.94 | J4.15 73.04,26.35 73.04,29.15 v73.76,29.89
  Bottom 0.2: v66.97,36.94 66.97,35.7 69.35,33.33 70.35,33.33 v73.76,29.89
G3  (via drill 0.4)
  Top 0.2: IC1.66 63.1,39.21 64.47,37.84 v66.26,37.84 | J4.16 | J4.16 | v72.64,29.86 72.51,29.74 J4.16
  Bottom 0.2: v66.26,37.84 66.24,35.61 69.05,32.81 69.81,32.81 72.64,29.96 | 72.64,29.96 72.64,29.98 | 72.64,29.96 v72.64,29.86
G4  (via drill 0.4)
  Top 0.2: IC1.67 63.65,39.71 64.65,38.7 65.48,38.7 v65.48,38.72 | J4.17 72.03,26.4 72.02,29.38 v71.52,29.88
  Bottom 0.2: v65.48,38.72 65.48,35.65 68.83,32.3 69.01,32.12 69.59,32.12 71.52,30.2 v71.52,29.88
G5  (via drill 0.4)
  Top 0.2: IC1.68 64.16,40.21 v64.68,39.69 | J4.18 71.52,26.37 71.53,26.39 71.53,28.76 v70.41,29.88
  Bottom 0.2: v64.68,39.69 64.69,35.67 68.53,31.84 68.85,31.52 69.21,31.52 70.41,30.32 v70.41,29.88
GND  (via drill 0.4)  (7 unrouted)
  Top 0.2: v38.75,50.32 39.11,49.95 IC1.100 39.13,45.46 | 51.12,29.98 51.11,29.98 IC1.50 | v51.72,28.7 51.11,29.31 51.11,29.98 51.12,29.98 | 51.12,29.98 51.13,29.99 | 44.11,29.88 IC1.36 44.11,31.17 43.89,31.39 | v43.85,31.44 v43.84,31.44 | 39.13,45.46 39.13,45.38 | C9.2 39.13,45.95 39.13,45.46 | C6.2 37.35,29.6 v37.35,30.43 37.35,31.71 IC1.25 | v39.59,37.11 39.49,37.21 38.92,37.21 37.41,37.21 37.39,37.19 IC1.14 37.42,37.21 | IC1.25 37.27,31.71 | 43.89,31.39 43.57,31.71 IC1.25 | v43.84,31.44 43.84,31.44 | 43.89,31.39 v43.84,31.44 | C4.2 52.89,47.24 52.89,47.19 51.6,47.19 50.61,46.2 IC1.77 50.61,45.4 50.62,45.38 50.61,45.37 50.61,44.77 51.67,43.71 | 51.67,43.71 IC1.75 | 51.66,37.21 IC1.62 | 51.16,36.88 50.46,37.58 50.46,41.66 51.67,42.87 51.67,43.67 51.65,43.69 51.67,43.71 | v51.33,36.88 | 51.66,37.21 | v51.33,36.88 51.66,37.21 | C18.2 28.96,38.86 30.61,37.21 37.42,37.21 | 37.42,37.21 37.44,37.19 | J4.39 61,26.35 60.99,26.36 60.99,26.35 J4.40 | 66.51,26.36 66.52,26.37 | 66.51,26.36 J4.28 66.96,26.35 66.98,26.37 66.99,26.35 J4.27 66.53,26.35 66.53,25.39 v67.76,24.15 67.82,24.11 67.83,24.1 67.84,24.11 69.22,24.11 70.51,25.4 J4.20 70.98,26.35 70.99,26.35 J4.19 71.01,25.38 72.34,24.05 73.24,24.05 74.38,25.19 74.5,25.32 74.51,26.29 J4.12 74.97,26.35 75,26.38 75.01,26.37 J4.11 75.01,25.32 76.32,24 79.2,24 80.02,24.82 80.02,26.32 80.04,26.35 80.03,26.35 J4.1 79.98,26.35 79.97,26.36 79.97,26.35 J4.2 | J4.29 J4.28 66.51,26.36
  Top 0.406: v56.56,7.2 56.48,7.24 v59.8,7.22 | v65.69,3.22 66.99,1.92 v71.1,1.92 | C4.2 52.88,47.32 | v49.05,31.72 49.05,34.6 v51.33,36.88 51.16,36.88 | C22.1 13.74,35.08 v14.37,34.46 | v40.7,11.51 40.7,11.89 39.8,12.79 34.52,12.79 v29.56,7.84 | v51.72,28.7 51.72,28.71 54.08,26.35 J4.40
  Top 0.6: v25.72,43.84 v25.72,48.12
  Top 0.61: 65.69,5.17 U$13.6 v65.69,3.22 | v47.06,68.08 48.63,68.08 50.67,70.12 57.45,70.12 v59.66,67.9
  Top 0.813: 52.88,47.32 v55.88,50.32 | v27.74,41.77 C18.2 27.7,38.86 27.68,38.89 26.31,38.89 25.21,37.78 v25.21,34.46 | v20.03,32.54 17.72,30.22 17.62,30.32 | 17.62,30.32 14.37,33.57 v14.37,34.46 | 17.72,30.42 | 17.72,30.42 17.62,30.32 | 17.72,30.42 v17.72,27.45 17.7,27.43 17.7,22.21 22.77,17.14 22.77,5.14 23.68,4.24
  Bottom 0.2: IC3.28 15.52,34.45 15.51,34.46 v14.37,34.46 | IC3.11 22.05,40.44 22.63,39.85 27.68,39.85 27.7,39.83 27.72,39.85 C11.- | IC3.21 IC3.22 | IC3.21 20.12,34.43 | 20.75,32.54 23.39,32.54 24,33.14 IC3.15 24.98,34.45 v25.21,34.46 | 20.75,32.54 20.09,33.2 20.09,34.3 20.1,34.31 IC3.21 | 20.75,32.54 v20.03,32.54
  Bottom 0.406: 52.13,9.55 J3.15 | J3.26 52.13,9.55 | 52.13,9.55 52.11,9.57 52.11,28.32 51.73,28.7 v51.72,28.7 51.69,29.29 C10.2 | J3.35 40.7,7.26 | 40.7,7.26 J3.6 v40.7,11.51 | J2.11 J2.10 | J2.11 J2.12 | J2.12 J2.11 | J2.12 | J3.23 55.91,6.54 v56.56,7.2 | C1.- 64.18,7.22 v59.8,7.22 | v71.1,1.92 71.13,1.92 | C7.2 43.51,31.77 v43.85,31.44 43.89,31.44 43.87,31.41 43.87,30.75 44.72,29.9 49.05,29.9 | v37.35,30.43 37.35,33.91 39.02,35.58 40.1,35.58 C5.2 40.03,35.49 40.03,36.66 v39.59,37.11 | 49.05,29.9 C8.2 | R9.1 54.49,50.32 54.53,50.28 54.58,50.32 | C3.2 50.2,36.65 51.1,36.65 v51.33,36.88 | v49.05,31.72 49.05,29.9 | J3.38 36.89,6.9 37.24,7.26 40.7,7.26 | 29.51,7.78 29.53,7.76 29.56,7.8 v29.56,7.84 | J2.11 J2.12 | v59.66,67.9 59.8,67.78 59.82,67.75
  Bottom 0.6: C21.1 13.38,35.44 v14.37,34.46 | 21.41,48.1 25.7,48.1 v25.72,48.12 | v27.74,41.77 27.83,41.77 25.76,43.84 v25.72,43.84
  Bottom 0.61: v47.06,68.08 J2.11 | v59.66,67.9 59.68,67.88 59.68,54.12 v55.88,50.32
  Bottom 0.813: C1.- 64.24,7.24 65.75,5.72 65.75,3.28 v65.69,3.22 | 44.08,50.32 R4.1 | 44.08,50.32 R3.1 41.97,50.32 v38.75,50.32 | 44.08,50.32 | 46.08,50.36 46.09,50.37 | 46.08,50.36 R5.1 48.01,50.3 48.07,50.37 48.12,50.32 R6.1 50.16,50.32 50.19,50.35 50.22,50.31 R7.1 52.34,50.31 | 44.08,50.32 46.04,50.32 46.08,50.36 | 52.34,50.31 52.33,50.31 R8.1 54.38,50.31 54.39,50.32 | 52.34,50.31 52.39,50.37 | 54.39,50.32 54.42,50.35 | R9.1 54.39,50.32 | C8.2 50.44,29.92 50.46,29.9 C10.2 | v55.88,50.32 54.58,50.32 | C14.1 18.75,25.15 18.75,25.16 18.75,25.15 17.72,25.15 | 17.72,25.15 C15.1 | 27.72,39.84 27.72,39.72 | 27.72,39.84 C11.- | v27.74,41.77 27.72,41.73 27.72,39.84 | v17.72,27.45 17.72,25.15 | C2.- 67.93,20.53 67.77,20.66 v67.76,24.15
  Bottom 1.016: 23.68,4.24 X1.1 23.69,4.23 22.79,5.13 R19.1 24.68,7.7 29.43,7.7 29.51,7.78 31.24,9.51 31.37,9.51 31.37,9.54 R2.1
  Bottom 1.27: 24.09,48.1 24.24,48.1 | 24.09,48.1 C20.2 | C19.2 21.41,48.1 24.09,48.1
HSYNC
  Top 0.2: IC1.53 59.07,32.71 64.51,27.27 64.51,26.28 64.51,26.29 J4.32
MISO  (via drill 0.4)
  Top 0.406: U$13.7 64.58,9.46 61.95,12.1 56.28,12.1 v55.96,11.73
  Top 0.61: U$13.7 64.58,4.05 v64.38,3.85
  Bottom 0.406: 55.96,9.51 55.95,9.51 J3.18 | v55.96,11.73 55.96,9.51 | 55.96,9.51 55.98,9.48
  Bottom 0.61: R10.1 64.45,1.71 | R10.1 | v64.38,3.85 64.38,1.78 R10.1
MOSI  (via drill 0.4)
  Top 0.406: v54.69,11.7 54.69,11.89 57.31,14.51 63.01,14.51 68.98,8.56 68.98,5.09 | 68.98,5.09 U$13.3 | 68.98,5.09 68.95,5.07
  Top 0.61: U$13.3 68.94,5.38 68.93,5.38 69,5.31 v69,3.79
  Bottom 0.406: J3.17 54.67,11.68 v54.69,11.7
  Bottom 0.61: R11.1 69.34,3.46 v69,3.79
N$1  (via drill 0.4)
  Top 0.2: 37.37,38.21 37.39,38.23 | 37.37,38.21 IC1.12 | v35.88,38.2 IC1.12 37.37,38.21
  Bottom 0.406: R15.1 35.73,38.21 v35.88,38.2
N$2  (via drill 0.4)
  Top 0.2: IC1.83 47.61,42.52 v47.61,42.46
  Bottom 0.406: R16.1 47.62,41.26 47.61,41.19 47.61,41.28 v47.61,42.46
N$3  (via drill 0.4)
  Top 0.2: J4.36 62.53,26.34 62.55,26.35 J4.35 62.77,26.35 62.77,26.19
  Top 0.254: 62.77,26.19 62.75,26.19 v62.77,25.04
  Bottom 0.406: 62.78,24.99 62.78,24.92 | 62.78,24.92 L1.1 | v62.77,25.04 62.78,24.92
N$4  (1 unrouted)
N$5  (via drill 0.4)  (1 unrouted)
  Top 0.2: IC1.38 45.11,28.42 50.12,23.41 v55.7,23.41
  Bottom 0.406: v55.7,23.41 55.7,35.7 65.75,45.75
N$6  (3 unrouted)
N$7  (3 unrouted)
N$8
  Bottom 0.2: 21.97,28.62 | 21.97,28.62 17.47,33.11 17.47,34.42 IC3.25
  Bottom 0.813: Q1.1 22.54,29.19 21.97,28.62 20.74,27.38 C14.2
N$9
  Bottom 0.2: Q1.2 16.86,33.12 16.86,34.3 16.85,34.31 IC3.26 | IC3.26 16.85,34.48 | IC3.26
  Bottom 0.813: C15.2 14.7,25.14 14.7,25.13 14.7,27.45 12.92,29.22 | 12.92,29.22 12.85,29.3 | 12.92,29.22 Q1.2
N$10  (via drill 3.5 pad 6)
  other vias: 14,61.03
N$11  (via drill 3.5 pad 6)
  other vias: 86.75,61.03
N$12  (via drill 3.5 pad 6)
  other vias: 5.25,8.78
N$13  (via drill 3.5 pad 6)
  other vias: 86.75,8.78
N$14  (via drill 0.4)
  Top 0.2: v51.33,32.87 51.33,32.34 51.95,31.71 52.78,31.71 52.79,31.7 52.8,31.71 IC1.51
  Bottom 0.406: C10.1 51.69,32.51 v51.33,32.87
N$15
  Top 0.2: IC1.1 37.06,43.71 35.84,44.93 C9.1
N$23  (via drill 0.4)
  Top 0.2: 37.37,40.2 37.45,40.2 | 37.37,40.2 IC1.8 | v35.86,40.47 36.13,40.2 37.37,40.2
  Bottom 0.406: R1.1 35.11,40.47 v35.86,40.47
N$35  (via drill 0.4)
  Top 0.2: IC1.85 46.61,44.19 v45.63,43.21
  Bottom 0.406: v45.63,43.21 45.63,43.92 41.93,47.62 41.93,48.38 41.96,48.41 41.95,48.42 R3.2
N$36  (via drill 0.4)
  Top 0.2: IC1.84 47.11,43.56 v46.75,43.2
  Bottom 0.406: v46.75,43.2 46.75,44.7 43.99,47.46 43.99,48.34 43.97,48.36 44.01,48.39 R4.2
N$37  (via drill 0.4)
  Top 0.2: IC1.82 48.11,43.67 v48.6,43.18
  Bottom 0.406: v48.6,43.18 48.6,44.97 46.08,47.49 R5.2
N$38  (via drill 0.4)
  Top 0.2: IC1.81 48.61,45.51 48.61,46.5 v48.16,46.95
  Bottom 0.406: R6.2 v48.16,46.95
N$39  (via drill 0.4)
  Top 0.2: IC1.80 49.11,46.45 49.39,46.73 49.99,46.73 v50.23,46.97
  Bottom 0.406: R7.2 50.24,48.35 50.23,48.34 v50.23,46.97
N$40  (via drill 0.4)
  Top 0.2: IC1.79 49.61,43.28 v49.7,43.19
  Bottom 0.406: v49.7,43.19 49.7,43.58 52.3,46.18 52.3,47.88 52.34,47.93 52.31,47.96 R8.2
N$41  (via drill 0.4)
  Top 0.2: IC1.78 50.11,43.94 v50.85,43.2
  Bottom 0.406: 54.37,48.01 | 54.37,48.01 R9.2 | v50.85,43.2 54.37,46.73 54.37,48.01
N$65  (via drill 0.4)
  Top 0.813: C18.1 v27.74,34.41
  Bottom 0.2: IC3.16 23.35,35.35 24.26,36.26 27.81,36.26 27.8,36.25 C11.+
  Bottom 0.813: C11.+ v27.74,34.41
N$67  (via drill 0.4)
  Top 0.406: v22.74,36.15 22.74,27.82 v28.68,21.88
  Bottom 0.2: IC3.9 20.75,38.15 v22.74,36.15
  Bottom 0.813: 28.68,19.96 C16.+ | 28.68,19.96 v28.68,21.88 | 28.68,19.96 28.69,19.95
N$68  (via drill 0.4)
  Top 0.406: v21.85,38.23 21.85,23.71 v23.7,21.86
  Bottom 0.2: IC3.10 21.4,38.68 v21.85,38.23
  Bottom 0.813: C17.+ 23.72,19.58 23.7,19.57 v23.7,21.86
N$69
  Bottom 1.016: C17.- 22.77,15.4 22.77,11.51 R19.2 20.88,11.5 19.11,9.73 19.11,7.61 19.03,7.53 19.04,7.52 X1.2
N$70
  Bottom 1.016: R2.2 30.79,12.03 X1.3 28.64,12.11 28.64,16.35 C16.-
NBS1/NUB  (via drill 0.4)
  Top 0.2: v55.95,68.07 46.7,58.81 40.77,58.81 38.03,56.08 38.03,52.3 v36.09,50.36 | IC1.11 38.94,38.71 v39.64,39.41
  Bottom 0.2: v36.09,50.36 36.09,42.97 v39.64,39.41
  Bottom 0.406: J2.18 v55.96,68.07 v55.95,68.07
NCS3  (via drill 0.4)
  Top 0.2: 37.37,41.2 37.42,41.2 | 37.37,41.2 IC1.6 | 32.16,44.09 35.06,41.2 37.37,41.2
  Top 0.302: 32.16,44.09 32.16,56.97
  Top 0.406: v54.7,68.07 46.07,59.44 34.63,59.44 32.16,56.97
  Bottom 0.406: J2.17 v54.7,68.07
NOE  (via drill 0.4)
  Top 0.2: IC1.9 35.44,39.71 31.48,43.67
  Top 0.302: 31.49,57.4 31.49,43.9 31.48,43.67
  Top 0.406: v53.44,68.11 45.56,60.24 34.33,60.24 31.49,57.4
  Bottom 0.406: J2.16 53.44,70.05 v53.44,68.11
NPCS1  (via drill 0.4)
  Top 0.302: v59.78,10.08 59.74,10.08 56.98,10.08 54.37,7.47 54.37,6.06 41.01,6.04 38.19,8.86 v38.19,11.61
  Top 0.406: U$13.2 70.08,9.21 v69.37,9.92
  Bottom 0.406: v69.37,9.92 69.21,10.08 v59.78,10.08 | J3.4 38.16,9.44 | J3.4 | v38.19,11.61 38.16,11.59 J3.4
NRST  (via drill 0.4)
  Top 0.2: IC1.13 39.08,37.72 v39.66,38.29
  Top 0.406: v53.4,7.17 53.42,7.19 53.42,16.2 v44.85,24.77
  Bottom 0.406: J3.25 v53.4,7.17 | v44.85,24.77 41.37,28.25 41.37,36.58 39.8,38.15 v39.66,38.29
NWAIT  (via drill 0.4)
  Top 0.2: v28.02,27.24 28.02,28.94 34.79,35.7 37.38,35.7 37.37,35.71 IC1.17
  Bottom 0.406: J3.3 36.89,18.36 v28.02,27.24
NWE  (via drill 0.4)
  Top 0.2: IC1.10 35.16,39.21 30.78,43.57
  Top 0.302: 30.78,43.57 30.78,57.64
  Top 0.406: 30.78,57.64 30.78,57.84 33.96,61.01 45.04,61.01 v52.14,68.11
  Bottom 0.406: 52.15,70.15 52.16,70.16 | 52.15,70.15 J2.15 | v52.14,68.11 52.14,70.14 52.15,70.15
PB27/PCK0  (via drill 0.4)
  Top 0.2: v58.53,63.59 53.19,58.25 40.89,58.25 38.54,55.9 38.54,51.45 v37.42,50.32 | v41.01,39.44 41.01,37.1 40.09,36.17 39.23,36.17 38.72,36.68 37.51,36.68 37.46,36.73 37.45,36.71 IC1.15
  Bottom 0.2: v37.42,50.32 37.42,50.21 37.4,50.19 37.4,43.05 v41.01,39.44
  Bottom 0.406: J2.21 58.53,65.69 v58.53,63.59
R0
  Top 0.2: IC1.69 64.8,40.71 66.88,38.62 74,38.62 78.03,34.59 78.03,26.37 78.02,26.37 J4.5
R1  (via drill 0.4)
  Top 0.2: IC1.70 64.94,41.21 66.6,39.55 v72.36,39.55 | J4.6 77.53,26.37 77.53,33.89 v73.97,37.44
  Bottom 0.2: v72.36,39.55 72.36,39.06 v73.97,37.44
R2  (via drill 0.4)
  Top 0.2: IC1.71 65.06,41.71 66.51,40.27 v69.31,40.27 | v72.44,37.46 72.76,37.46 77.03,33.19 77.03,26.37 77.02,26.37 J4.7
  Bottom 0.2: v69.31,40.27 69.63,40.27 v72.44,37.46
R3  (via drill 0.4)
  Top 0.2: IC1.72 65.61,42.21 v66.75,41.08 | v69.31,36.66 72.9,36.64 76.51,33.04 76.49,26.41 76.52,26.37 J4.8
  Bottom 0.2: 69.37,36.64 69.34,36.66 | 69.34,36.66 v69.31,36.66 | v66.75,41.08 66.75,39.25 69.34,36.66
R4  (via drill 0.4)
  Top 0.2: IC1.73 66.17,42.71 v66.76,42.14 | v70.91,35.89 72.98,35.88 76.03,32.83 76.02,26.3 | 76.02,26.3 76.01,26.3 J4.9 | 76.02,26.3 76.03,26.28
  Bottom 0.2: v66.76,42.14 66.78,42.14 67.52,41.4 67.52,39.61 70.95,36.18 70.91,36.13 v70.91,35.89
R5  (via drill 0.4)
  Top 0.2: IC1.74 v66.78,43.21 | v72.44,35.04 75.53,31.95 75.53,26.34 | 75.53,26.34 75.53,26.33 | J4.10 arc-90 75.53,26.34
  Bottom 0.2: v66.78,43.21 66.78,43.14 68.06,41.85 68.06,39.85 72.46,35.45 72.44,35.44 v72.44,35.04
SPCK  (via drill 0.4)
  Top 0.406: U$13.5 66.78,8.65 62.45,12.98 57.45,12.98 v57.24,13.01
  Bottom 0.406: v57.24,13.01 56.12,13.01 54.49,13.01 53.4,11.91 53.4,9.55 53.36,9.51 | 53.36,9.51 53.33,9.48 | J3.16 53.36,9.51
TD0  (via drill 0.4)
  Top 0.406: v39.47,68.11 37.81,66.46 35.33,66.46 20.75,51.88 v20.75,51.59
  Bottom 0.2: v20.75,51.59 19.6,51.59 17.5,49.49 IC3.4 | IC3.4 | IC3.4 17.56,41.68
  Bottom 0.406: J2.5 39.47,70.05 v39.47,68.11
TF0  (via drill 0.4)
  Top 0.406: v38.17,68.13 37.31,67.27 34.99,67.27 19.64,51.92 v19.64,50.31
  Bottom 0.2: IC3.5 18.16,48.83 v19.64,50.31
  Bottom 0.406: J2.4 38.18,68.14 v38.17,68.13
TK0  (via drill 0.4)
  Top 0.406: v36.91,68.18 34.77,68.18 v18.18,51.59
  Bottom 0.2: IC3.3 16.87,41.76 16.91,41.8 16.83,41.83 16.84,50.24 18.22,51.62 v18.18,51.59
  Bottom 0.406: J2.3 v36.91,68.18
TWCK  (via drill 0.4)
  Top 0.406: v40.72,68.11 38.3,65.69 35.66,65.69 21.94,51.97 21.94,44.89 17.75,40.7 v17.75,39.92
  Bottom 0.2: IC3.24 18.16,39.51 v17.75,39.92
  Bottom 0.406: J2.6 v40.72,68.12 v40.72,68.11
TWD  (via drill 0.4)
  Top 0.406: v41.96,68.13 38.76,64.94 36.01,64.94 22.72,51.65 22.72,44.53 19.08,40.89 v19.08,39.9
  Bottom 0.2: IC3.23 18.8,34.39 | IC3.23 | v19.08,39.9 18.8,39.61 IC3.23
  Bottom 0.406: J2.7 41.96,70.04 v41.96,68.13
VCCA
  Bottom 0.2: IC3.8 20.11,41.77 20.12,41.77 20.12,43.83 C19.1 | IC3.14 24.02,41.78 24.02,45.04 C20.1
  Bottom 0.6: L2.1 24.22,45.03 24.15,45.1
  Bottom 1.27: 24.09,45.1 24.15,45.1 | 24.09,45.1 C20.1 | C19.1 24.09,45.1
VSYNC  (1 unrouted)
  Top 0.2: IC1.52 58.97,32.21 64.01,27.17 64.01,26.32 64.01,26.33 J4.33